# EAGLE board breadboarder (EAGLE 6.5.0)

Size 100 x 80 mm. Coordinates in mm from the lower left corner, seen from the top.
Outline: 0,0 100,0 100,80 0,80 0,0
Copper layers (1*16): Top 0.035mm / dielectric 1.5mm / Bottom 0.035mm
Design rules "default": minimum track width 10mil, minimum drill 24mil, track to track 8mil, track to pad 8mil, pad to pad 8mil, via to via 8mil, smd to smd 8mil, copper to edge 40mil, drill to drill 8mil, minimum pad ring 10mil, minimum via ring 8mil, stop-mask expansion 4mil, vias tented up to drill 0mil, thermal gap 10mil

## Footprints (pad centres in the part's own frame; a part is rotated, then mirrored left to right if it is on the bottom)
1X02 = drill 1.016 pad 1.88: 1 0,0; 2 2.54,0
1X03_LONGPADS = drill 1.118 pad 1.88 long: 1 0,0; 2 2.54,0; 3 5.08,0
1X08_LONGPADS = drill 1.118 pad 1.88 long: 1 0,0; 2 2.54,0; 3 5.08,0; 4 7.62,0; 5 10.16,0; 6 12.7,0; 7 15.24,0; 8 17.78,0
1X07_LONGPADS = drill 1.016 pad 1.88 long: 1 0,0; 2 2.54,0; 3 5.08,0; 4 7.62,0; 5 10.16,0; 6 12.7,0; 7 15.24,0
C1206 = smd 1.6 x 1.8: 1 -1.4,0; 2 1.4,0
LED-1206 = smd 1.2 x 1.4: A -1.5,0; C 1.5,0
FTDI_BASIC = drill 1.016 pad 1.88: CTS 10.16,0; DTR 0,0; GND 12.7,0; RXI 2.54,0; TXO 5.08,0; VCC 7.62,0
DIL28-3 = drill 0.813 long: 1 -16.51,-3.81; 2 -13.97,-3.81; 3 -11.43,-3.81; 4 -8.89,-3.81; 5 -6.35,-3.81; 6 -3.81,-3.81; 7 -1.27,-3.81; 8 1.27,-3.81; 9 3.81,-3.81; 10 6.35,-3.81; 11 8.89,-3.81; 12 11.43,-3.81; 13 13.97,-3.81; 14 16.51,-3.81; 15 16.51,3.81; 16 13.97,3.81; 17 11.43,3.81; 18 8.89,3.81; 19 6.35,3.81; 20 3.81,3.81; 21 1.27,3.81; 22 -1.27,3.81; 23 -3.81,3.81; 24 -6.35,3.81; 25 -8.89,3.81; 26 -11.43,3.81; 27 -13.97,3.81; 28 -16.51,3.81
2X3 = drill 1.016 pad 1.88 octagon: 1 0,0; 2 0,2.54; 3 2.54,0; 4 2.54,2.54; 5 5.08,0; 6 5.08,2.54
1X02' = drill 1.016 long: 1 -1.27,0; 2 1.27,0
TO-92 = drill 0.813 pad 1.88: 1 -1.27,0; 2 0,1.905; 3 1.27,0
RPACK-SIP-PTH-8-LP = drill 0.8 pad 1.676 square: P$1 0,0 | drill 0.8 pad 1.676: P$2 0,-2.54; P$3 0,-5.08; P$4 0,-7.62; P$5 0,-10.16; P$6 0,-12.7; P$7 0,-15.24; P$8 0,-17.78; P$9 0,-20.32
TACTILE-PTH = drill 1.016 pad 1.88: 1 -3.251,2.261; 2 3.251,2.261; 3 -3.251,-2.261; 4 3.251,-2.261

## Placement (x,y rotation side)
AGND  M02PTH  [1X02]  -60.96,-78.74 0 top  (outside the outline)
ANALOG  [1X03_LONGPADS]  -38.1,-15.24 0 top  (outside the outline)
AVCC  M02PTH  [1X02]  -60.96,-71.12 0 top  (outside the outline)
BANKB  [1X08_LONGPADS]  73.66,2.54 0 top
BANKC  [1X07_LONGPADS]  30.48,2.54 0 top
BANKD  [1X08_LONGPADS]  50.8,2.54 0 top
C3  0.1uF  [C1206]  -26.67,3.81 0 top  (outside the outline)
D1  Yellow  [LED-1206]  -36.83,-20.32 0 top  (outside the outline)
D2  Yellow  [LED-1206]  -41.91,-34.29 0 top  (outside the outline)
D3  Yellow  [LED-1206]  -41.91,-39.37 0 top  (outside the outline)
D4  Yellow  [LED-1206]  -41.91,-44.45 0 top  (outside the outline)
D5  Yellow  [LED-1206]  -41.91,-49.53 0 top  (outside the outline)
D6  Yellow  [LED-1206]  -41.91,-54.61 0 top  (outside the outline)
D7  Yellow  [LED-1206]  -41.91,-59.69 0 top  (outside the outline)
D8  Yellow  [LED-1206]  -41.91,-64.77 0 top  (outside the outline)
FTDI  FTDI_BASICPTH  [FTDI_BASIC]  43.18,30.48 180 top
IC1  AVR-MEGA8-PPTH  [DIL28-3]  59.69,16.51 0 top
ISP  AVR_SPI_PRG_6PTH  [2X3]  22.86,25.4 270 top
POWER  [1X02']  -17.78,35.56 0 top  (outside the outline)
Q1  MOSFET-NCHANNEL2N7000  [TO-92]  -36.83,-30.48 0 top  (outside the outline)
R2  [RPACK-SIP-PTH-8-LP]  -41.91,-10.16 0 top  (outside the outline)
S1  [TACTILE-PTH]  -50.8,-63.5 0 top  (outside the outline)
S2  [TACTILE-PTH]  -59.69,-63.5 0 top  (outside the outline)

## Library data of the parts
AGND ANALOG AVCC BANKB BANKC BANKD FTDI ISP = SparkFun-Connectors
C3 = rcl
D1-D8 = SparkFun-LED; PROD_ID: DIO-09909
IC1 = SparkFun-DigitalIC
POWER = pinhead
Q1 = SparkFun-DiscreteSemi
R2 = SparkFun-Resistors
S1 S2 = SparkFun-Electromechanical

## Nets
AGND: AGND.2 ANALOG.1 IC1.22
AREF: ANALOG.3 IC1.21
AVCC: ANALOG.2 AVCC.1
GND: AGND.1 C3.2 FTDI.GND IC1.8 ISP.6 POWER.1 Q1.1 S1.4 S2.4
N$1: Q1.3 R2.P$1
N$2: D2.C R2.P$8
N$3: D3.C R2.P$7
N$4: D4.C R2.P$6
N$5: D5.C R2.P$5
N$6: D6.C R2.P$4
N$7: D7.C R2.P$3
N$8: D8.C R2.P$2
N$9: D1.C R2.P$9
PB0: BANKB.8 D1.A IC1.14
PB1: BANKB.7 D2.A IC1.15
PB2: BANKB.6 D3.A IC1.16
PB3: BANKB.5 D4.A IC1.17 ISP.4
PB4: BANKB.4 D5.A IC1.18 ISP.1
PB5: BANKB.3 D6.A IC1.19 ISP.3
PB6: BANKB.2 D7.A IC1.9
PB7: BANKB.1 D8.A IC1.10
PC0: BANKC.7 IC1.23
PC1: BANKC.6 IC1.24
PC2: BANKC.5 IC1.25
PC3: BANKC.4 IC1.26
PC4: BANKC.3 IC1.27
PC5: BANKC.2 IC1.28
PD0: BANKD.8 FTDI.TXO IC1.2
PD1: BANKD.7 FTDI.RXI IC1.3
PD2: BANKD.6 IC1.4 S2.1
PD3: BANKD.5 IC1.5
PD4: BANKD.4 IC1.6
PD5: BANKD.3 IC1.11
PD6: BANKD.2 IC1.12
PD7: BANKD.1 IC1.13
RESET: BANKC.1 IC1.1 ISP.5 Q1.2 S1.1
VCC: AVCC.2 C3.1 FTDI.VCC IC1.7 ISP.2 POWER.2

## Tracks (layer width: path | path; a pad name or v marks a point on that pad's centre or on a via)
AGND  (2 unrouted)
AREF  (1 unrouted)
AVCC  (1 unrouted)
GND  (8 unrouted)
N$1  (1 unrouted)
N$2  (1 unrouted)
N$3  (1 unrouted)
N$4  (1 unrouted)
N$5  (1 unrouted)
N$6  (1 unrouted)
N$7  (1 unrouted)
N$8  (1 unrouted)
N$9  (1 unrouted)
PB0  (2 unrouted)
PB1  (2 unrouted)
PB2  (2 unrouted)
PB3  (3 unrouted)
PB4  (3 unrouted)
PB5  (3 unrouted)
PB6  (2 unrouted)
PB7  (2 unrouted)
PC0  (1 unrouted)
PC1  (1 unrouted)
PC2  (1 unrouted)
PC3  (1 unrouted)
PC4  (1 unrouted)
PC5  (1 unrouted)
PD0  (2 unrouted)
PD1  (2 unrouted)
PD2  (2 unrouted)
PD3  (1 unrouted)
PD4  (1 unrouted)
PD5  (1 unrouted)
PD6  (1 unrouted)
PD7  (1 unrouted)
RESET  (4 unrouted)
VCC  (5 unrouted)